# Allegro board LAYOUT.brd
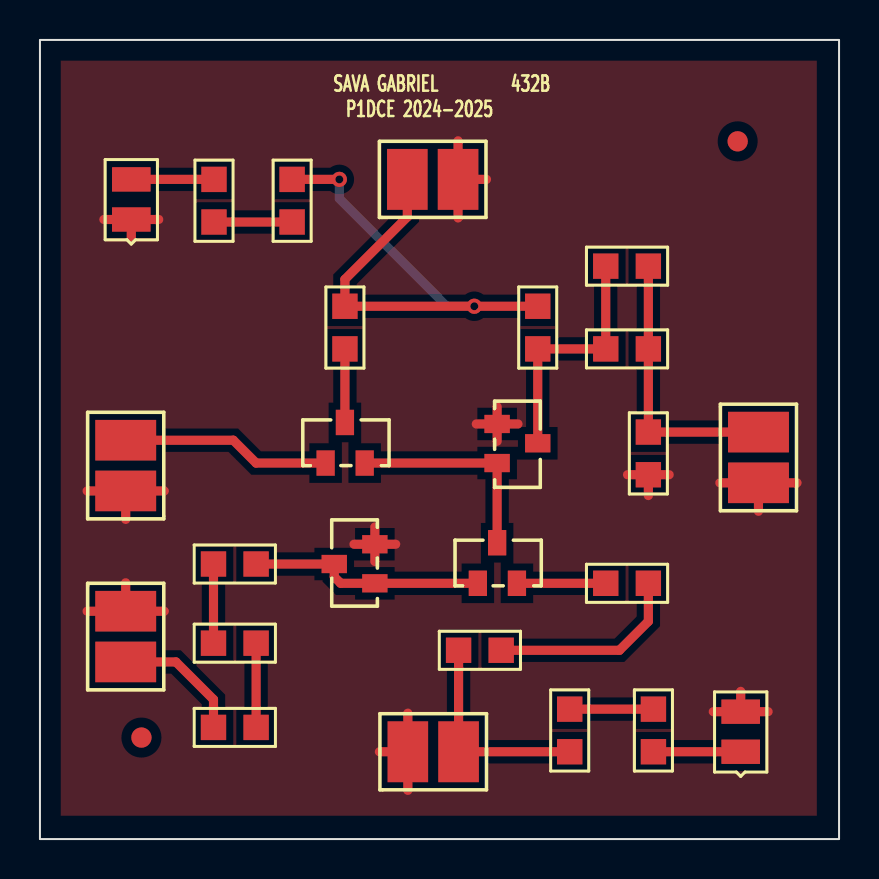
[diagram p0: board, top side]
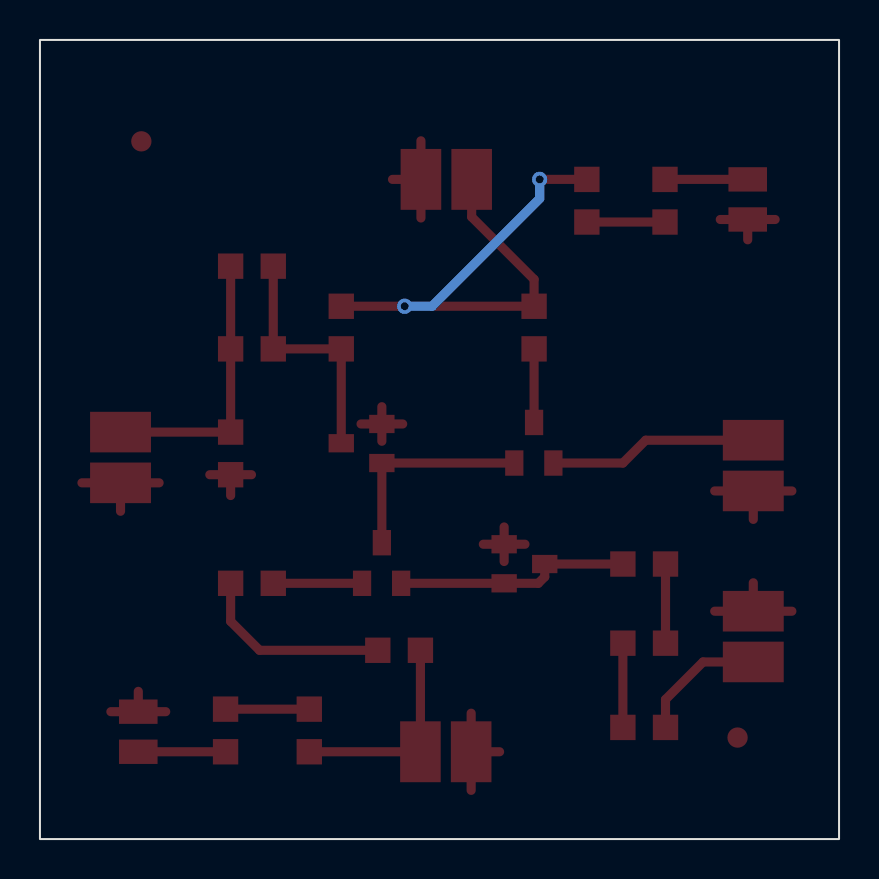
[diagram p1: board, bottom side, seen from below]

Outline 40 x 40 mm; copper layers: TOP, BOTTOM. Coordinates in mm from the lower left corner of the outline.
Outline path: rectangle 0,0 40,40

## Placement (name value [footprint] x y rotation side)
C3  4.7u  [SMC0805]  28.32 24.54 0 top
C4  4.7u  [SMC0805]  28.32 28.68 0 top
CONTROL  CON2  [JUMPER2]  4.29 11.4 270 top
D3  3V,LED,LED  [SMD0805]  4.57 31.01 90 top
D4  3V,LED,LED  [SMD0805]  35.08 4.37 90 top
IN  CON2  [JUMPER2]  4.29 17.42 90 top
NOREF  -  []  0 40 0 top
NOREF#2  -  []  40 0 90 top
NOREF#3  -  []  0 0 90 top
NOREF#4  -  [unnamed#2]  34.92 34.92 0 top
NOREF#5  -  []  0 0 0 top
NOREF#6  -  [unnamed#2]  5.08 5.08 0 top
OUT  CON2  [JUMPER2]  35.97 20.37 270 top
Q6  BC846B  [TO236]  14.3 18.95 270 top
Q7  BC846B  [TO236]  23.01 20.78 180 top
Q8  BC846B  [TO236]  16.64 12.8 0 top
Q9  BC846B  [TO236]  21.92 12.93 270 top
R19  220  [SMR0805]  12.62 30.89 90 top
R20  1k5  [SMR0805]  24.92 24.54 90 top
R21  1k5  [SMR0805]  15.27 24.54 90 top
R22  680  [SMR0805]  30.45 20.37 270 top
R23  220  [SMR0805]  8.71 30.89 90 top
R24  100  [SMR0805]  8.69 13.77 0 top
R25  150  [SMR0805]  10.82 9.8 180 top
R26  2.2k  [SMR0805]  30.45 12.8 180 top
R27  150  [SMR0805]  8.69 5.59 0 top
R28  100  [SMR0805]  20.95 9.45 0 top
R29  220  [SMR0805]  26.52 6.5 270 top
R30  220  [SMR0805]  30.71 6.5 270 top
V+  CON2  [JUMPER2]  18.39 33.02 0 top
V-  CON2  [JUMPER2]  18.41 4.37 0 top

## Library data of the parts
C3 C4 = C
CONTROL IN OUT V+ V- = CON2: User Part Number: ***
D3 D4 = LED_0
Q6-Q9 = BC846B_0
R19-R30 = R

## Footprints (pads in the part's own frame, mm; a bottom-side part is the same pattern mirrored in y, then rotated)
JUMPER2
  rect 2.032x3.048 smd: 1(0,0) 2(2.54,0)
SMC0805
  rect 1.27x1.27 smd: 1(0,0) 2(2.134,0)
SMD0805
  rect 1.219x1.93 smd: A(2.007,0) C(0,0)
SMR0805
  rect 1.27x1.27 smd: 1(0,0) 2(2.134,0)
TO236
  rect 1.27x0.914 smd: 1(0.127,0) 2(0.127,1.956) 3(-1.905,0.965)
unnamed#2
  round 1.016 smd: (0,0)

## Nets
0: CONTROL.1 D3.C D4.A IN.1 OUT.2 Q7.1 Q8.2 R22.2 V+.2 V-.1
V+: R19.2 R20.2 R21.2 V+.1
V-: R28.1 R29.2 V-.2
N278356: R19.1 R23.1
N278362: C3.1 C4.1 Q7.3 R20.1
N278366: Q6.3 R21.1
N278486: C3.2 C4.2 OUT.1 R22.1
N278514: IN.2 Q6.1
N278532: D3.A R23.2
N278538: Q6.2 Q7.2 Q9.3
N278622: Q8.1 Q8.3 Q9.1 R24.2
N278688: R24.1 R25.2
N278786: R25.1 R27.2
N278820: R26.1 R28.2
N278898: R29.1 R30.1
N278924: D4.C R30.2
N279822: CONTROL.2 R27.1
N2787242: Q9.2 R26.2

## Via types
v1: diameter 0.762, hole 0.4, TOP to BOTTOM, 2 vias

## Routing (per net, layer and track width the routed paths; a pad name or vN(x,y) marks a point on that pad's centre or on a via; arc(x,y) is an arc through that point)
0: length 44.7
  TOP w0.457: 30.45,17.2 R22.2 ; R22.2 31.5,18.24 ; R22.2 29.41,18.24 ; 16.99,4.37 V-.1 ; V-.1 18.41,6.3 ; V-.1 18.41,2.44 ; 16.76,13.89 Q8.2 ; Q8.2 15.72,14.76 ; Q8.2 16.76,15.62 ; Q8.2 17.81,14.76 ; 34.04,17.83 OUT.2 ; OUT.2 37.9,17.83 ; OUT.2 35.97,16.41 ; Q7.1 23.93,20.78 ; Q7.1 22.89,19.91 ; Q7.1 21.84,20.78 ; Q7.1 22.89,21.64 ; 3.2,31.01 D3.C ; D3.C 4.57,30 ; D3.C 5.94,31.01 ; V+.2 22.35,33.02 ; V+.2 20.93,31.09 ; V+.2 20.93,34.95 ; CONTROL.1 4.29,12.83 ; CONTROL.1 2.36,11.4 ; CONTROL.1 6.22,11.4 ; IN.1 6.22,17.42 ; IN.1 2.36,17.42 ; IN.1 4.29,16 ; 33.71,6.38 D4.A ; D4.A 36.45,6.38 ; D4.A 35.08,7.39
V+: length 29.6
  TOP w0.457: R19.2 v1(14.99,33.02) ; R20.2 v1(21.74,26.67) R21.2 15.27,28.02 18.39,31.14 V+.1
  BOTTOM w0.457: v1(21.74,26.67) 20.37,26.67 14.99,32.05 v1(14.99,33.02)
V-: length 10.6
  TOP w0.457: R28.1 V-.2 R29.2
N278356: length 3.9
  TOP w0.457: R23.1 R19.1
N278362: length 12.3
  TOP w0.457: C4.1 C3.1 R20.1 Q7.3
N278366: length 3.7
  TOP w0.457: R21.1 Q6.3
N278486: length 13.8
  TOP w0.457: C4.2 C3.2 R22.1 OUT.1
N278514: length 10.5
  TOP w0.457: Q6.1 10.82,18.82 9.68,19.96 IN.2
N278532: length 4.1
  TOP w0.457: R23.2 D3.A
N278538: length 10.6
  TOP w0.457: Q9.3 Q7.2 Q6.2
N278622: length 11.9
  TOP w0.457: Q9.1 Q8.1 15.06,12.8 14.73,13.12 Q8.3 R24.2
N278688: length 4
  TOP w0.457: R24.1 R25.2
N278786: length 4.2
  TOP w0.457: R25.1 R27.2
N278820: length 9.9
  TOP w0.457: R28.2 29.01,9.45 30.45,10.9 R26.1
N278898: length 4.2
  TOP w0.457: R29.1 R30.1
N278924: length 4.4
  TOP w0.457: R30.2 D4.C
N279822: length 6.6
  TOP w0.457: CONTROL.2 6.81,8.86 8.69,6.99 R27.1
N2787242: length 4.4
  TOP w0.457: R26.2 Q9.2

## Copper pours and planes (outline as drawn; the poured copper is in the pictures)
0 on TOP: 1.04,38.96 1.04,1.17 38.89,1.17 38.89,38.96

## Text on the board
Ref Des/Silkscreen Top: SAVA GABRIEL | P1DCE 2024-2025 | 432B
XSECTION_CHART: *  SURFACE - AIR 0 MIL | L1: TOP CONDUCTOR - COPPER 0.71 MIL | *  DIELECTRIC - FR-4 61.57 MIL | L2: BOTTOM CONDUCTOR - COPPER 0.71 MIL | DESIGN CROSS SECTION CHART | ___________________________ | TOTAL THICKNESS 62.99 MIL | 1-2 | FIGURE | SIZE | 15.74 | DRILL CHART: TOP to BOTTOM | ALL UNITS ARE IN MILS | PLATED | QTY | 2
